# Altium PCB Carte_Micro_PIC18F.PcbDoc
Units mm, origin at the board's own origin, x right, y up, seen from the top; angles counter-clockwise.
Board outline 152.4 x 101.6 mm, 2 copper layers (Top Layer, Bottom Layer); 22 components, 28 nets, 118 pads, 20 vias.
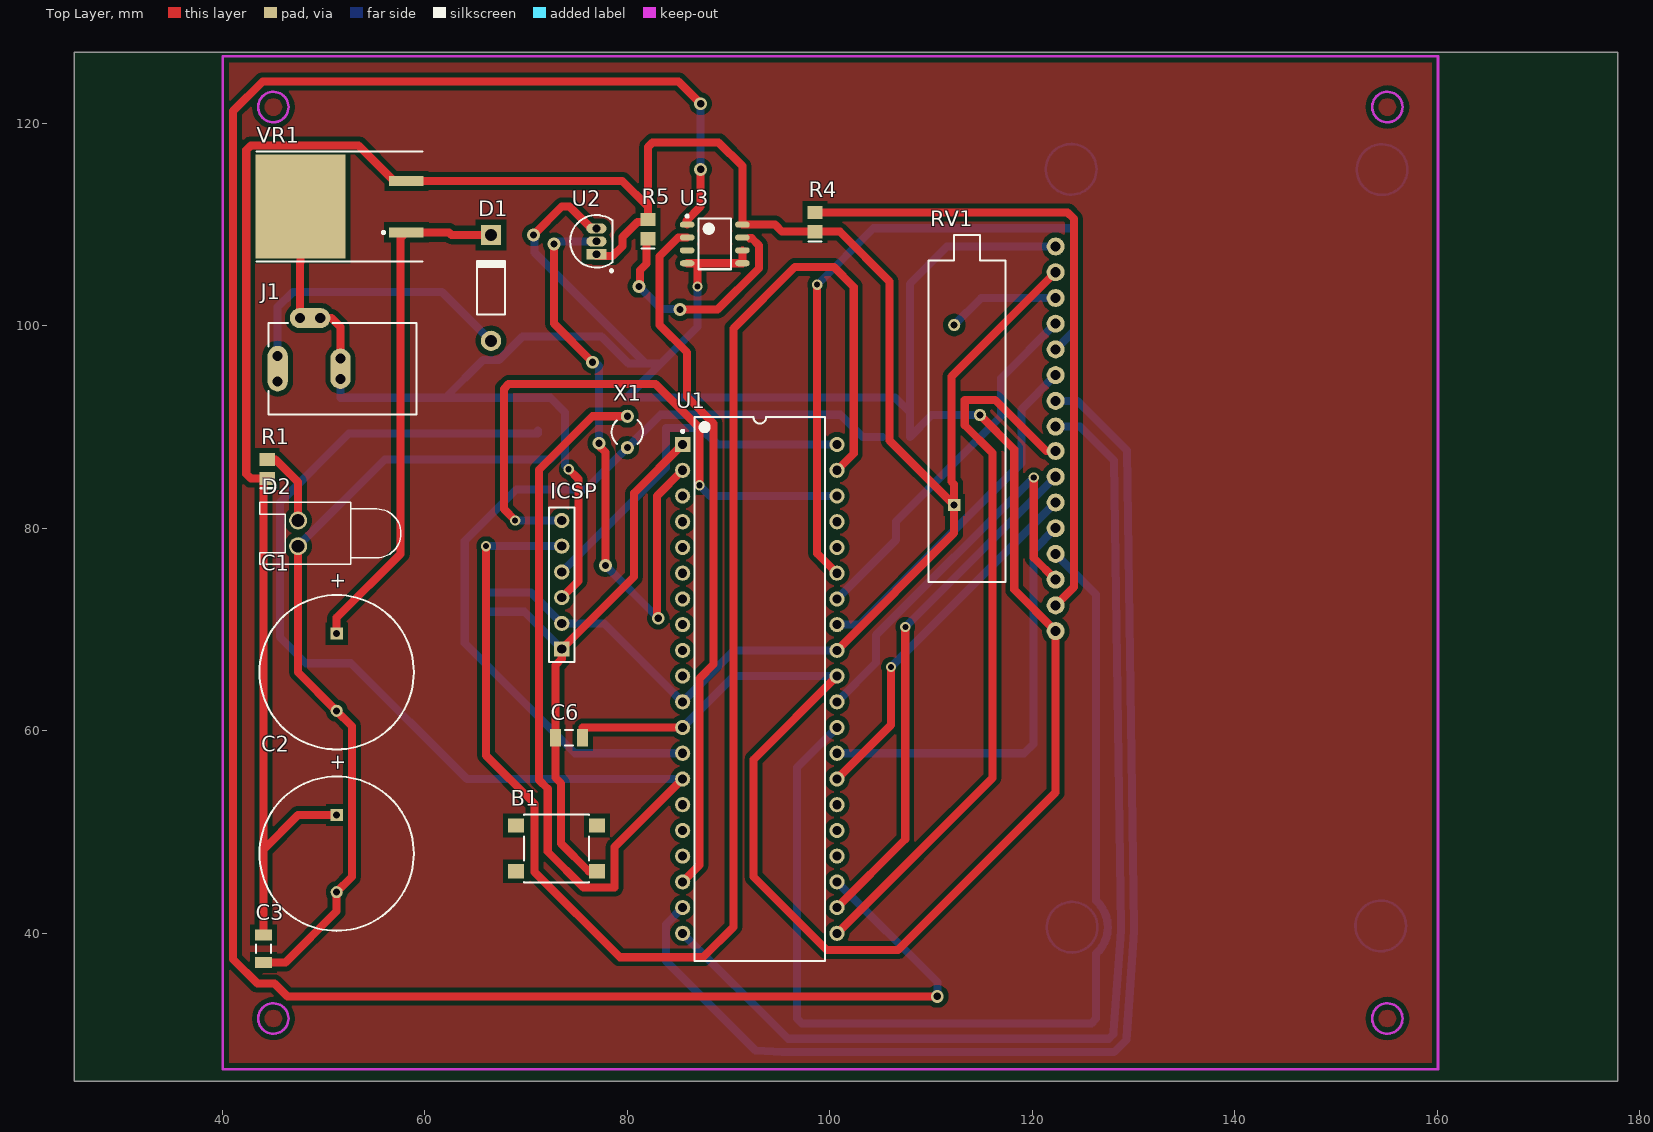
[diagram p0: Top Layer view]
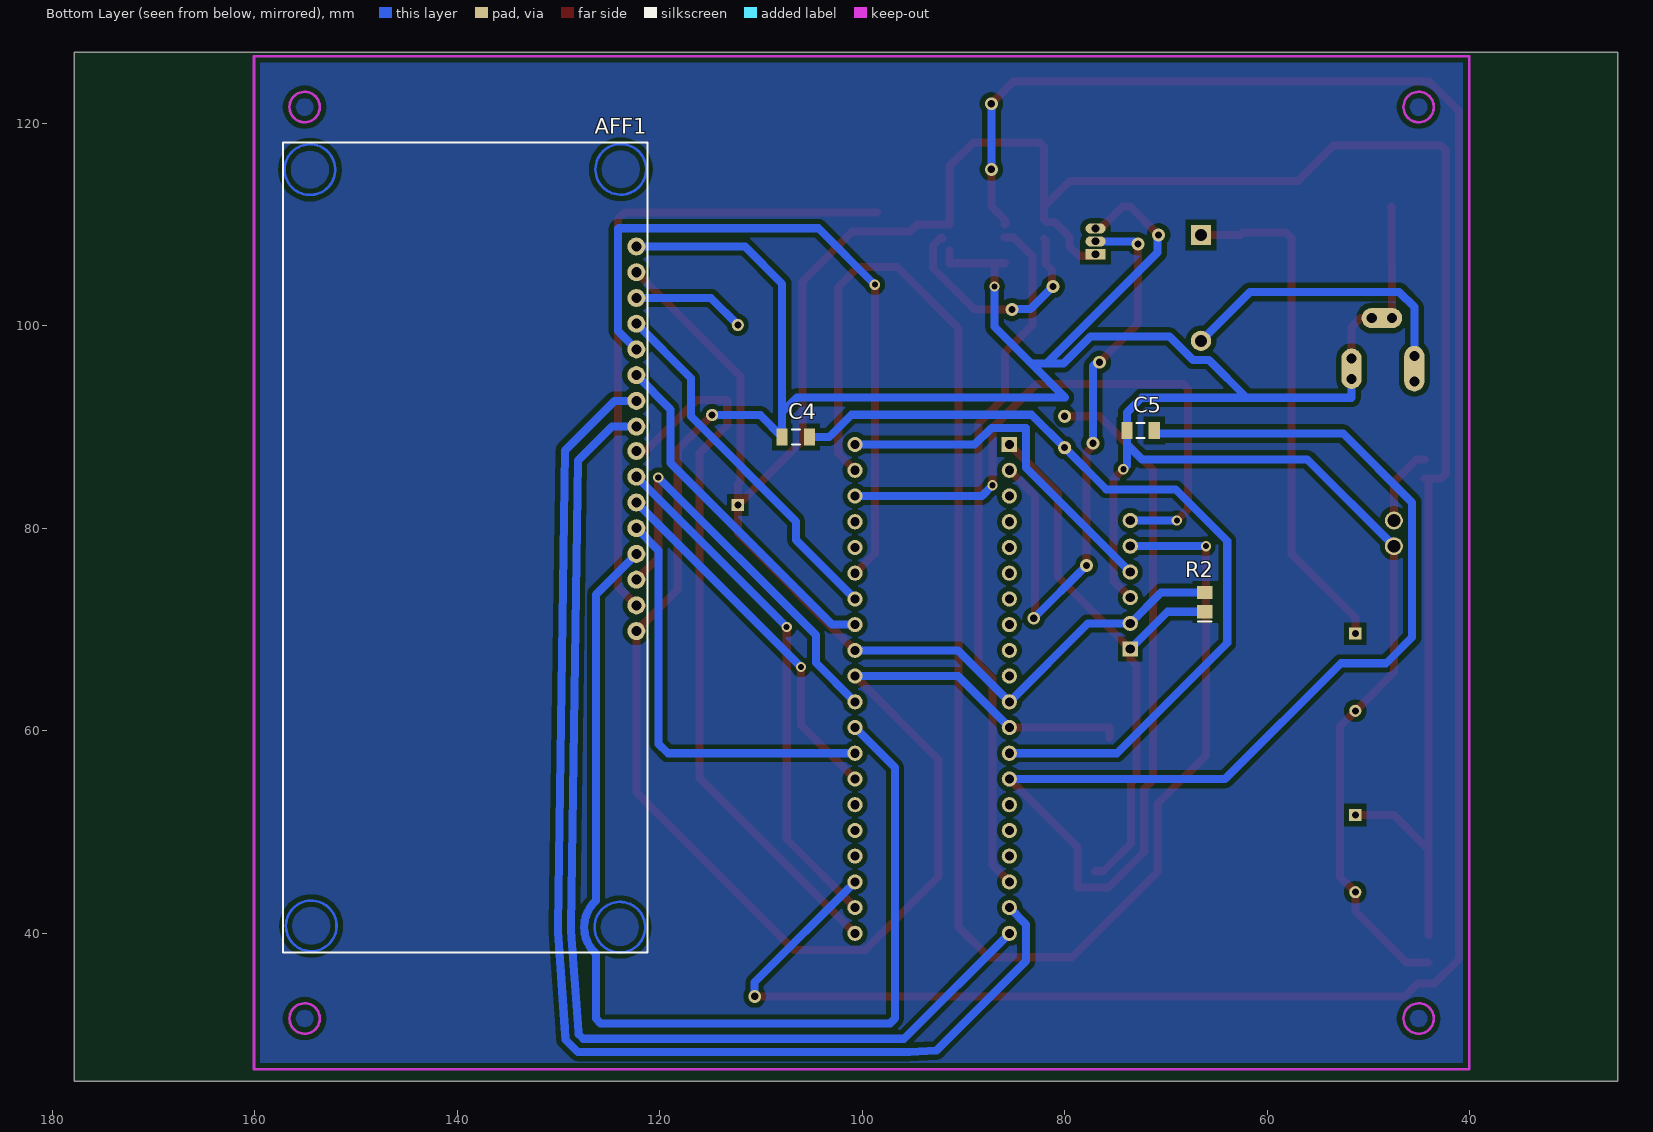
[diagram p1: Bottom Layer view, seen from below]

## Layer stack, top to bottom
Top Solder: solder mask 0.0102, Solder Resist, Dk 3.5
Top Layer: signal copper 0.0356
Dielectric 1: dielectric 0.32, FR-4, Dk 4.8
Bottom Layer: signal copper 0.0356
Bottom Solder: solder mask 0.0102, Solder Resist, Dk 3.5

## Board outline
25.4,25.4 177.8,25.4 177.8,127 25.4,127

## Design rules (kind name [scope] priority, off if disabled: settings)
Clearance [All] p1: gap=0.5 ignorepadtopadclearanceinfootprint=FALSE
PolygonConnect [All] p1: connectstyle=Relief reliefconductorwidth=0.254 reliefentries=4 polygonreliefangle="90 Angle" airgapwidth=0.254
RoomDefinition U_MCU [InComponentClass('U_MCU')] p1: confinementstyle=ConfineIn formatcopy=TRUE lockcomponents=FALSE outline 50.546,35.814 108.839,35.814 108.839,92.71 50.546,92.71
RoomDefinition U_AFF [InComponentClass('U_AFF')] p2: confinementstyle=ConfineIn formatcopy=TRUE lockcomponents=FALSE outline 108.218,35.306 158.891,35.306 158.891,118.364 108.218,118.364
RoomDefinition U_Sensor [InComponentClass('U_Sensor')] p3: confinementstyle=ConfineIn formatcopy=TRUE lockcomponents=FALSE outline 74.041,105.029 92.583,105.029 92.583,113.792 74.041,113.792
RoomDefinition U_Power [InComponentClass('U_Power')] p4: confinementstyle=ConfineIn formatcopy=TRUE lockcomponents=FALSE outline 60.579,34.29 60.579,118.618 40.894,118.618 40.894,34.29
RoutingVias [All] p1: holewidth=0.6 width=1 viastyle="Through Hole" minholewidth=0.6 minwidth=1 maxholewidth=0.6 maxwidth=1
SolderMaskExpansion [All] p1: expansion=0.102 istentingtop=FALSE
Width 5V [All] p1: maxlimit=0.8 minlimit=0.8 preferedwidth=0.8
Width 12V [All] p2: maxlimit=1 minlimit=1 preferedwidth=1
Width [All] p3: maxlimit=1 minlimit=0.5 preferedwidth=0.5
30 further rules are at their usual default settings.

## Classes and differential pairs
component class U_Sensor: R5 U2 U3
component class U_Power: C1 C2 C3 D1 D2 J1 R1 VR1
component class U_MCU: B1 C4 C5 C6 ICSP R2 U1 X1
component class U_AFF: AFF1 R4 RV1

## Components (designator, comment, footprint, x,y, rotation, side; value= is the part's Value field where it differs from the comment)
AFF1 "LCD 16X2" "lcd 16x2" 177.179,101.092 r270 bottom
B1 "PB" "Push button" 72.771,48.895 r180 top
C1 "Cap Pol1" RB7.6-15 51.308,65.786 r90 top value=100uF
C2 "Cap Pol1" RB7.6-15 51.308,47.879 r90 top value=10uF
C3 "Cap Semi" C1206 44.069,38.481 r90 top value=100nF
C4 "Cap Semi" C1206 106.553,89.027 r180 bottom value=27pF
C5 "Cap Semi" C1206 72.517,89.662 r180 bottom value=27pF
C6 "Cap Semi" C1206 74.248,59.309 r0 top value=100nF
D1 "Diode 1N4001" DO-41 66.548,103.736 r90 top
D2 "LED0" LED-0 47.498,79.502 r90 top
ICSP "Header 6" HDR1X6 73.533,68.072 r90 top
J1 "PWR2.5" KLD-0202 59.182,95.758 r180 top
R1 "Res1" 0805 44.45,85.852 r90 top value=330
R2 "Res2" 0805 66.167,72.705 r90 bottom value=10K
R4 "Res Semi" 0805 98.552,110.236 r90 top value=1K
R5 "Res1" 0805 82.042,109.54 r90 top value=10K
RV1 "Res Tap" VR3 113.552,91.186 r90 top value=4K7
U1 "PIC18F4520-E/P" PDIP600-P40 93.091,64.135 r0 top
U2 "LM35CAZ" Z03A 76.962,108.331 r0 top
U3 "TCN75-3.3MOA" SOIC127P600X175-8N 88.646,108.077 r0 top
VR1 "L7805ABD2T" TO-263 52.959,111.76 r90 top
X1 "XTAL" R38 80.01,89.509 r0 top

## Footprints (in the part's own frame and the unit in brackets; to place one, negate y for a bottom-side part, rotate by r counter-clockwise, add the part's x,y. Pads: shape width x height; smd on the part's side, far side on the other; paste and mask are expansions set on the pad)
0805 [mm] "Chip Capacitor; Body 2.0 x 1.2 mm (LxW typ)"
  rect 1.3x1.5 smd: 1(-0.95,0) 2(0.95,0)
  silkscreen extent -1.9,-0.65 -1.9,0.65
C1206 [mm] "Chip Capacitor, Body 3.2x1.6mm, IPC High Density"
  rect 1.1x1.7 smd: 1(-1.35,0) 2(1.35,0)
  silkscreen extent -0.4,-0.75 0.4,0.75, body extent -1.7,-0.9 1.7,0.9, height 1.3
DO-41 [mm] "Diode, Axial; Body 5.2 x 2.7 mm (LxDia. max), Lead Dia. 0.86 mm (max)"
  round 2 hole 1.2: 1(-5.23,0)
  rect 2x2 hole 1.2: 2(5.23,0)
  silkscreen extent -2.65,-1.4 2.75,1.4
HDR1X6 [mm] "Connector; Header; 6 Position"
  rect 1.5x1.5 hole 0.9: 1(0,0)
  round 1.5 hole 0.9: 2(2.54,0) 3(5.08,0) 4(7.62,0) 5(10.16,0) 6(12.7,0)
  silkscreen extent -1.27,-1.27 13.97,1.27
KLD-0202 [mm] "DC Power Jack, 2.5mm, KLD Series, PCB Mount"
  oval 2x4.5 all layers, no hole: 1(13.7,0)
  round 1.5 hole 1: 1A(13.7,-1.25) 1B(13.7,1.25) 2A(7.5,-1) 2B(7.5,1) 3A(9.5,-5) 3B(11.5,-5)
  oval 2x4 all layers, no hole: 2(7.5,0)
  oval 4x2 all layers, no hole: 3(10.5,-5)
  silkscreen extent 0,-4.5 14.6,4.5
"lcd 16x2" [mil]
  round 70 hole 39.37: 1(-265,2160.55) 2(-165,2160.55) 3(-65,2160.55) 4(35,2160.55) 5(135,2160.55) 6(235,2160.55) 7(335,2160.55) 8(435,2160.55) 9(530,2160.55) 10(630,2160.55) 11(730,2160.55) 12(830,2160.55) 13(930,2160.55) 14(1030,2160.55) 15(1130,2160.55) 16(1230,2160.55)
  Top Layer circle w10: c-565,2100 r98.43
  Top Layer circle w10: c-563.79,891.6 r98.43
  Top Layer circle w10: c2381.21,2096.6 r98.43
  Top Layer circle w10: c2376.21,896.6 r98.43
  silkscreen extent -669,787 2480,2205
LED-0 [mil] "LED; 2 Leads"
  round 70 hole 50: 1(50,0) 2(-50,0)
  silkscreen extent -120,-400 120,150
PDIP600-P40 [mm] "DIP, 40-Leads, Row Spacing 15.24mm, Pitch 2.54mm, Body 51.8x13.5mm"
  rect 1.5x1.5 hole 0.9: 1(-7.62,24.13)
  round 1.5 hole 0.9: 2(-7.62,21.59) 3(-7.62,19.05) 4(-7.62,16.51) 5(-7.62,13.97) 6(-7.62,11.43) 7(-7.62,8.89) 8(-7.62,6.35) 9(-7.62,3.81) 10(-7.62,1.27) 11(-7.62,-1.27) 12(-7.62,-3.81) 13(-7.62,-6.35) 14(-7.62,-8.89) 15(-7.62,-11.43) 16(-7.62,-13.97) 17(-7.62,-16.51) 18(-7.62,-19.05) 19(-7.62,-21.59) 20(-7.62,-24.13) 21(7.62,-24.13) 22(7.62,-21.59) 23(7.62,-19.05) 24(7.62,-16.51) 25(7.62,-13.97) 26(7.62,-11.43) 27(7.62,-8.89) 28(7.62,-6.35) 29(7.62,-3.81) 30(7.62,-1.27) 31(7.62,1.27) 32(7.62,3.81) 33(7.62,6.35) 34(7.62,8.89) 35(7.62,11.43) 36(7.62,13.97) 37(7.62,16.51) 38(7.62,19.05) 39(7.62,21.59) 40(7.62,24.13)
  silkscreen extent -7.74,-26.85 6.45,26.85, body extent -7.3,-26.85 7.3,26.85, height 6.35
"Push button" [mm]
  rect 1.6x1.4 smd paste+0 mask+0: 1(-4.254,2.758) 2(3.746,2.758) 3(-4.254,-1.742) 4(3.746,-1.742)
  silkscreen extent -3.45,-2.84 2.95,3.86
R38 [mm] "Crystal, Thru-Hole; 2 Leads; Body 3.1 x 8.2 mm (Dia.xH)"
  round 1.3 hole 0.7: 1(0,1.55) 2(0,-1.55)
  silkscreen extent -1.55,-1.19 1.55,1.17
RB7.6-15 [mm] "Polarized Capacitor (Radial); 2 Leads"
  rect 1.2x1.2 hole 0.7: 1(3.81,0)
  round 1.2 hole 0.7: 2(-3.81,0)
  silkscreen extent -7.62,-7.62 7.62,7.62
SOIC127P600X175-8N [mm] "SOIC, 8-Leads, Body 4.90x3.90mm, Pitch 1.27mm, IPC Medium Density"
  oval 1.45x0.6 smd: 1(-2.725,1.905) 2(-2.725,0.635) 3(-2.725,-0.635) 4(-2.725,-1.905) 5(2.725,-1.905) 6(2.725,-0.635) 7(2.725,0.635) 8(2.725,1.905)
  silkscreen extent -2.85,-2.5 1.6,2.88, body extent -2,-2.5 2,2.5, height 1.75
TO-263 [mm] "D2-PAK/TO-263-AB; 3 Leads (1 Cropped); Body 15.9 (inc. leads) x 10.4 mm (LxW max)"
  rect 1x3.4 smd: 1(-2.54,-5.225) 3(2.54,-5.225)
  rect 10.25x8.9 smd: 4(0,5.225)
  silkscreen extent -5.42,-6.82 5.42,9.57
VR3 [mm] "Thru-Hole; 3 Leads"
  rect 1.2x1.2 hole 0.7: 1(-8.89,1.27)
  round 1.2 hole 0.7: 2(0,-1.27) 3(8.89,1.27)
  silkscreen extent -16.51,-3.81 17.78,3.81
Z03A [mm] "TO, Flat Index; 3 In-Line, Axial Leads; Body Dia. 5mm; Leads 0.55 x 0.50 mm (max)"
  rect 2x1 hole 0.75: 1(0,-1.27)
  oval 2x1 hole 0.75: 2(0,0) 3(0,1.27)
  silkscreen extent -2.6,-3.02 1.61,2.6, body extent -2.6,-2.61 1.6,2.61, height 5.2

## Part data
AFF1: library part AFF
C1 C2: "Polarized Capacitor (Radial)", LatestRevisionDate=17-Jul-2002, LatestRevisionNote="Re-released for DXP Platform.", PackageDescription="Polarized Capacitor (Radial); 2 Leads", PackageReference=RB7.6-15, Published=8-Jun-2000, Publisher="Altium Limited"
C3 C4 C5 C6: "Capacitor (Semiconductor SIM Model)", LatestRevisionDate=29-May-2009, LatestRevisionNote="IPC-7351 Footprint Added.", PackageDescription="Chip Capacitor", PackageReference=C1206, Published=8-Jun-2000, Publisher="Altium Limited"
D1: "1 Amp General Purpose Rectifier", Code_JEDEC=DO-204-AL, ComponentLink1Description="Manufacturer Link", ComponentLink1URL=http://www.fairchildsemi.com/, ComponentLink2Description=Datasheet, ComponentLink2URL=http://www.fairchildsemi.com/ds/1N%2F1N4001.pdf, DatasheetVersion=1998, LatestRevisionDate=17-Jul-2002, LatestRevisionNote="Re-released for DXP Platform.", PackageDescription="Diode, Axial; Body 5.2 x 2.7 mm (LxDia. max), Lead Dia. 0.86 mm (max)", PackageReference=DO-41, PackageVersion=Aug-1999, Published=8-Jun-2000, Publisher="Altium Limited"
D2: "Typical INFRARED GaAs LED", LatestRevisionDate=08-Jul-2005, LatestRevisionNote="Mech Layer 1 removed.", PackageDescription="LED; 2 Leads", PackageReference=LED-0, Published=8-Jun-2000, Publisher="Altium Limited"
ICSP: "Header, 6-Pin", LatestRevisionDate=17-Jul-2002, LatestRevisionNote="Re-released for DXP Platform.", Publisher="Altium Limited"
J1: "Low Voltage Power Supply Connector", ComponentLink1Description="Manufacturer Link", ComponentLink1URL=http://domino.kycon.com/internet/Products.html, DatasheetDocument=09-May-2002, Published=17-Dec-2003, Publisher="Altium Limited"
R1 R2 R5: "Resistor", LatestRevisionDate=17-Jul-2002, LatestRevisionNote="Re-released for DXP Platform.", Published=8-Jun-2000, Publisher="Altium Limited"
  R1 R5: PackageDescription="Axial Device, Thru-Hole; 2 Leads; 0.3 in Pin Spacing", PackageReference=AXIAL-0.3
  R2: PackageDescription="Axial Device, Thru-Hole; 2 Leads; 0.4 in Pin Spacing", PackageReference=AXIAL-0.4
R4: "Semiconductor Resistor", LatestRevisionDate=17-Jul-2002, LatestRevisionNote="Re-released for DXP Platform.", PackageDescription="Axial Device, Thru-Hole; 2 Leads; 0.5 in Pin Spacing", PackageReference=AXIAL-0.5, Published=8-Jun-2000, Publisher="Altium Limited"
RV1: "Tapped Resistor", LatestRevisionDate=17-Jul-2002, LatestRevisionNote="Re-released for DXP Platform.", PackageDescription="Variable Resistor, Thru-Hole; 3 Leads", PackageReference=VR3, Published=24-Mar-1999, Publisher="Altium Limited", Set Position=0.5, Sim Note="Enter the Resistance value and the set point into parameter fields."
U1: "Enhanced Flash Microcontroller with 10-Bit A/D and nanoWatt Technology, 32K Flash, 40-Pin PDIP, Extended Temperature Range", Supplier Part Number 1=PIC18F4520-E/P-ND, ComponentLink1Description=Datasheet, ComponentLink1URL=http://ww1.microchip.com/downloads/en/DeviceDoc/39631E.pdf, ComponentLink2Description="Packaging Specification", ComponentLink2URL=http://www.microchip.com/stellent/groups/techpub_sg/documents/packagingspec/en012702.pdf, ComponentLink3Description="Microchip.com Home", ComponentLink3URL=http://www.microchip.com/, DatasheetVersion="revE, Oct-2008", LatestRevisionDate=02-Dec-2009, LatestRevisionNote="Updated to datasheet revision E, Oct-2008", PackageDescription="40-Lead Plastic Dual In-Line (P) - 600 mil Body [PDIP]", PackageReference=PDIP600-P40, PackageVersion="revBB, Aug-2009", Published=29-Jan-2009, Publisher="Altium Limited", Supplier 1=Digi-Key
U2: "Precision Centigrade Temperature Sensor, 3-pin TO-92", Manufacturer="National Semiconductor", PackageTopMarking=NSXYTT*LM35*CAZ, PowerWise=N, Supplier Part Number 1=9494529, Code_JEDEC=TO-226-AA, ComponentLink1Description="LM35 Datasheet", ComponentLink1URL=http://www.national.com/ds/LM/LM35.pdf, ComponentLink2Description="LM35 Web Page", ComponentLink2URL=http://www.national.com/pf/LM/LM35.html, ComponentLink3Description="Z03A Package Page", ComponentLink3URL=http://www.national.com/packaging/folders/z03a.html, CompType="Temp Sensor IC", DatasheetVersion=Nov-2000, LatestRevisionDate=15-Jul-2009, LatestRevisionNote="Sch pins 1 & 3 reversed.", PackageDescription="TO-92, Molded, 3 Lead", PackageReference=Z03A, PackageVersion="revG, Sep-2000", PartNumber=LM35CAZ, PinCount=3, Published=4-Dec-2008, Publisher="Altium Limited", RoHS=N, Supplier 1=Farnell
U3: library part TCN75
VR1: "Precision 1A Regulator", ComponentLink1Description="Manufacturer Link", ComponentLink1URL=http://www.st.com/, ComponentLink2Description=Datasheet, ComponentLink2URL=http://www.st.com/stonline/products/literature/ds/2144/l7805ab.pdf, DatasheetVersion=Nov-1999, LatestRevisionDate=17-Jul-2002, LatestRevisionNote="Re-released for DXP Platform.", PackageDescription="D2-PAK/TO-263-AB; 3 Leads (1 Cropped); Body 15.9 (inc. leads) x 10.4 mm (LxW max)", PackageReference=TO-263, Published=24-Aug-2001, Publisher="Altium Limited"
X1: "Crystal Oscillator", LatestRevisionDate=17-Jul-2002, LatestRevisionNote="Re-released for DXP Platform.", PackageDescription="Crystal, Thru-Hole; 2 Leads; Body 3.1 x 8.2 mm (Dia.xH)", PackageReference=R38, Published=8-Jun-2000, Publisher="Altium Limited"

## Via types
v1: diameter 1.27, hole 0.711, Top Layer to Bottom Layer, 11 vias
v2: diameter 1, hole 0.6, Top Layer to Bottom Layer, 9 vias

## Nets (pads, with @x,y where several pads share a name; then routed paths per layer and width w, separated by ;. In a path a pad name is that pad's centre, name@x,y a point inside that pad or via, vN(x,y) a via of type N, cw(c..) or ccw(c..) an arc to the next point about the centre after c; other vN are vias at no path point)
5V: AFF1.2 C2.1 C3.2 ICSP.2 R1.1 R2.2 R4.1 R5.2 RV1.1 U1.11 U1.32 U2.1 U3.8 VR1.3 | length 290.1
  Top Layer w0.8: C3.2 44.069,48.26 ; R1.1@44.069,84.902 44.069,48.26 ; R1.1 42.852,84.902 42.383,85.371 42.383,117.337 42.852,117.805 53.467,117.805 56.972,114.3 VR1.3 79.502,114.3 82.042,111.76 ; C2.1 47.498,51.689 44.069,48.26 ; U2.1@76.898,106.87 78.549,106.87 79.531,107.852 79.531,108.751 81.019,110.24 81.792,110.24 R5.2 82.042,111.76 ; U1.32 112.282,79.516 RV1.1 ; AFF1.2 112.022,95.004 112.022,84.611 112.282,84.351 RV1.1 ; 82.042,111.76 82.042,117.641 82.511,118.11 89.027,118.11 91.371,115.766 U3.8 94.59,109.982 95.286,109.286 R4.1 100.99,109.286 105.893,104.384 105.893,88.685 RV1.1
  Bottom Layer w0.8: R2.2 70.49,73.655 ICSP.2 77.724,70.612 U1.11 90.551,67.945 U1.32
12V: D1.1 J1.1 J1.1A J1.1B | length 32.3
  Top Layer w0.8: J1.1B J1.1 J1.1A
  Bottom Layer w0.8: J1.1 J1.1A 45.482,101.835 46.99,103.343 61.711,103.343 D1.1
GND: AFF1.1 AFF1.16 C1.2 C2.2 C3.1 C4.1 C5.1 C6.2 D2.2 ICSP.3 J1.2 J1.2A J1.2B J1.3 J1.3A J1.3B RV1.2 U1.12 U1.31 U2.3 U3.4 U3.5 U3.6 VR1.4 | length 417.3
  Top Layer w0.8: C3.1 46.25,37.131 51.308,42.189 C2.2 52.832,45.593 52.832,60.452 C1.2 47.498,65.786 D2.2 ; J1.3B 47.682,106.223 47.734,106.275 VR1.4 ; J1.3 J1.3A 50.8,100.758 51.682,99.876 J1.2A J1.2 J1.2B ; v1(70.739,108.966) 73.533,111.76 74.303,111.76 76.462,109.601 U2.3 ; ICSP.3 75.184,74.803 75.184,84.861 v2(74.219,85.827) ; C6.2 75.598,60.325 U1.12 ; U3.4 86.944,106.172 ; v2(86.944,103.882) 86.944,106.172 ; U3.6 U3.5 86.944,106.172 ; U1.31 92.456,57.15 92.456,45.593 99.695,38.354 106.731,38.354 122.301,53.924 AFF1.16 118.212,73.939 118.212,87.796 RV1.2
  Bottom Layer w0.8: D2.2 56.058,86.792 72.39,86.792 73.867,88.269 ; J1.3B J1.3 J1.3A ; J1.2 J1.2B 51.682,92.888 62.027,92.888 ; v1(70.739,108.966) 70.829,108.876 70.829,107.225 81.788,96.266 ; v2(74.219,85.827) 73.867,86.178 73.867,88.269 ; U1.12 90.551,65.405 U1.31 ; v2(86.944,103.882) 86.944,99.898 83.312,96.266 ; RV1.2 110.062,91.186 C4.1 107.903,91.462 ; AFF1.1 111.586,107.823 107.903,104.14 107.903,91.462 ; 62.027,92.888 65.745,96.606 67.335,96.606 69.662,98.933 77.47,98.933 80.137,96.266 81.788,96.266 ; 62.027,92.888 72.419,92.888 73.867,91.44 C5.1 73.867,88.269 ; 81.788,96.266 83.312,96.266 ; 83.312,96.266 79.959,92.913 106.451,92.913 107.903,91.462
MCLR: B1.1 C6.1 ICSP.1 R2.1 U1.1 | length 58.4
  Top Layer w0.8: B1.1 76.2,46.137 73.452,48.885 73.452,54.818 72.898,55.372 C6.1 72.898,66.479 73.533,67.114 ICSP.1 80.67,75.209 80.67,83.464 U1.1
  Bottom Layer w0.8: R2.1 69.85,71.755 ICSP.1
NetAFF1_15: AFF1.15 R4.2 | length 64.7
  Top Layer w0.8: R4.2 123.485,111.186 124.104,110.566 124.104,74.193 AFF1.15
NetC1_1: C1.1 D1.2 VR1.1 | length 50.9
  Top Layer w0.8: C1.1 51.308,71.171 57.607,77.47 57.607,108.661 VR1.1 62.382,109.22 62.636,108.966 D1.2
NetD2_1: D2.1 R1.2 | length 7.8
  Top Layer w0.8: R1.2 45.253,86.802 47.498,84.557 D2.1
NetR5_1: R5.1 U3.7 | length 22.8
  Top Layer w0.8: v1(81.153,103.886) 81.243,103.976 81.243,105.479 81.885,106.121 81.885,108.433 R5.1 ; v1(85.217,101.6) 88.921,101.6 92.996,105.675 92.996,107.939 92.293,108.642 U3.7@92.075,108.642
  Bottom Layer w0.8: v1(81.153,103.886) 83.382,101.657 85,101.657 v1@85,101.6
OSC1: C4.2 U1.13 X1.2 | length 83.4
  Bottom Layer w0.8: U1.13 74.854,57.785 63.957,68.682 63.957,78.726 69.08,83.849 75.9,83.849 X1.2 83.266,91.215 101.063,91.215 103.251,89.027 C4.2
OSC2: C5.2 U1.14 X1.1 | length 158
  Top Layer w0.8: X1.1 76.556,91.059 71.272,85.776 71.272,55.159 72.152,54.28 72.152,48.066 75.691,44.526 78.74,44.526 78.74,48.514 U1.14
  Bottom Layer w0.8: C5.2 71.167,89.357 52.502,89.357 45.695,82.55 45.695,69.24 48.26,66.675 52.73,66.675 64.16,55.245 U1.14
PGC: ICSP.5 U1.39 | length 159.1
  Top Layer w0.8: v2(66.065,78.232) 66.065,57.582 70.852,52.796 70.852,46.065 79.273,37.643 87.478,37.643 90.475,40.64 90.475,99.72 96.545,105.791 100.406,105.791 102.362,103.835 102.362,87.376 U1.39
  Bottom Layer w0.8: v2(66.065,78.232) ICSP.5
PGD: ICSP.4 U1.40 | length 36.1
  Bottom Layer w0.8: ICSP.4 83.82,85.979 83.82,89.915 87.249,89.915 88.899,88.265 U1.40
PGM: ICSP.6 U1.38 | length 59
  Top Layer w0.8: v2(68.936,80.772) 67.818,81.89 67.818,93.765 68.287,94.234 82.803,94.234 87.121,89.916 v2(87.121,84.253)
  Bottom Layer w0.8: v2(68.936,80.772) ICSP.6 ; v2(87.121,84.253) 88.189,83.185 U1.38
RA0: U1.2 U2.2 | length 60.4
  Top Layer w0.8: v1@72.771,107.925 72.771,100.203 v1(76.581,96.393) ; v1@77.216,88.138 77.851,87.503 v1(77.851,76.327) ; v1@82.931,71.374 82.931,83.185 U1.2
  Bottom Layer w0.8: v1(72.771,108.077) 72.898,108.077 73.152,108.331 U2.2 ; v1@76.835,96.393 77.216,96.012 v1(77.216,88.392) ; v1(77.851,76.327) v1(83.058,71.12)
RB0: AFF1.6 U1.33 | length 34.9
  Bottom Layer w0.8: U1.33 102.975,70.485 118.923,86.433 118.923,91.745 AFF1.6
RB1: AFF1.4 U1.34 | length 36.1
  Bottom Layer w0.8: U1.34 106.528,78.842 106.528,80.67 116.916,91.059 116.916,94.818 AFF1.4
RB2: AFF1.5 U1.35 | length 69.7
  Top Layer w0.8: v2(98.755,104.051) 98.755,77.521 U1.35
  Bottom Layer w0.8: v2(98.755,104.051) 104.33,109.626 124.079,109.626 124.104,109.601 124.104,99.466 AFF1.5
RD0: AFF1.7 U1.19 | length 122.9
  Bottom Layer w0.8: U1.19 83.82,40.894 83.82,37.287 92.425,28.682 92.659,28.448 95.347,28.291 128.082,28.291 129.288,29.497 129.372,30.648 130.037,40.171 ccw(c123.925,40.609) 130.052,40.7 129.358,87.685 124.46,92.583 AFF1.7
RD1: AFF1.8 U1.20 | length 110.9
  Bottom Layer w0.8: U1.20 95.885,29.591 127.543,29.591 127.988,30.036 128.01,30.332 128.739,40.255 ccw(c123.925,40.609) 128.752,40.683 128.058,86.699 124.714,90.043 AFF1.8
RD2: AFF1.9 U1.21 | length 71.2
  Top Layer w0.8: U1.21 116.053,55.347 116.053,87.439 113.322,90.17 113.322,92.686 116.322,92.686 121.378,87.63 AFF1.9
RD3: AFF1.10 U1.22 | length 51.5
  Top Layer w0.8: U1.22 107.455,49.289 v2(107.455,70.244)
  Bottom Layer w0.8: v2(107.455,70.244) AFF1.10
RD4: AFF1.11 U1.27 | length 36.2
  Top Layer w0.8: U1.27 106.045,60.579 v2(106.045,66.294)
  Bottom Layer w0.8: v2(106.045,66.294) AFF1.11
RD5: AFF1.12 U1.28 | length 42
  Bottom Layer w0.8: U1.28 119.177,57.785 120.096,58.705 120.096,77.805 AFF1.12
RD6: AFF1.13 U1.29 | length 108.5
  Bottom Layer w0.8: U1.29 96.774,56.388 96.774,31.584 97.243,31.115 125.826,31.115 126.294,31.584 126.294,37.994 126.317,38.017 ccw(c123.925,40.609) 126.317,43.202 126.294,43.224 126.294,73.477 AFF1.13
RD7: AFF1.14 U1.30 | length 41.2
  Top Layer w0.8: v2(120.142,85.017) 120.142,77.089 AFF1.14
  Bottom Layer w0.8: U1.30 104.572,66.726 104.572,69.447 v2(120.142,85.017)
SCL: U1.18 U3.2 | length 68.8
  Top Layer w0.8: U1.18 87.121,46.735 87.121,65.179 88.521,66.579 88.521,90.354 85.885,92.99 85.885,97.376 83.185,100.076 83.185,106.858 85.039,108.712 U3.2
SDA: U1.23 U3.1 | length 230.8
  Top Layer w0.8: U3.1@85.921,110.012 85.852,110.081 85.852,110.363 87.249,111.76 v1(87.249,115.443) ; v1@87.122,122.047 85.048,124.121 44.009,124.121 41.083,121.195 41.083,37.444 43.487,35.04 45.184,35.04 46.442,33.782 v1(110.617,33.782)
  Bottom Layer w0.8: v1(87.249,115.443) v1(87.249,121.92) ; U1.23 110.617,35.179 v1(110.617,33.782)
VEE: AFF1.3 RV1.3 | length 11.1
  Bottom Layer w0.8: RV1.3 114.949,102.743 AFF1.3
pads on no net: B1.2 B1.3 B1.4 U1.3 U1.4 U1.5 U1.6 U1.7 U1.8 U1.9 U1.10 U1.15 U1.16 U1.17 U1.24 U1.25 U1.26 U1.36 U1.37 U3.3

## Polygon pours and split planes (outlines as drawn)
no net on Top Layer "NONET_L01_P000" (solid, pour order 0): 39.878,126.619 40.005,126.746 160.147,126.746 160.147,26.543 160.02,26.416 39.878,26.416 39.878,126.492 40.005,126.619
no net on Bottom Layer "NONET_L02_P001" (solid, pour order 1): 160.02,126.746 160.02,26.416 39.878,26.416 39.878,126.619 40.005,126.746 39.878,126.619 40.005,126.746

## Keep-outs
Keep-Out Layer:
  circle w0.254: c45.056,31.594 r1.5
  circle w0.254: c155.056,31.594 r1.5
  circle w0.254: c155.056,121.594 r1.5
  circle w0.254: c45.056,121.594 r1.5
  lines w0.254: 40.056,26.594 40.056,126.594 160.056,126.594 160.056,26.594 40.056,26.594

## Text inside footprints (layer, text, board x,y; h text height)
C1: Top Overlay "+" at 52.045,73.918 h1.5 r90
C2: Top Overlay "+" at 52.045,56.011 h1.5 r90
J1: Mechanical 1 "Mech 2 - Clearance, move to internal plane if present" at 58.896,90.692 h0.3 r180; Mechanical 1 "Mech 1 - Slot cut-out" at 58.896,90.192 h0.3 r180; Mechanical 1 "Assign keep-out area to slot" at 58.896,89.192 h0.3 r180; Mechanical 1 "Alert PCB fab to slot details" at 58.896,89.692 h0.3 r180